# EAGLE board no back side - ssr-board-v10 (EAGLE 7.2.0)
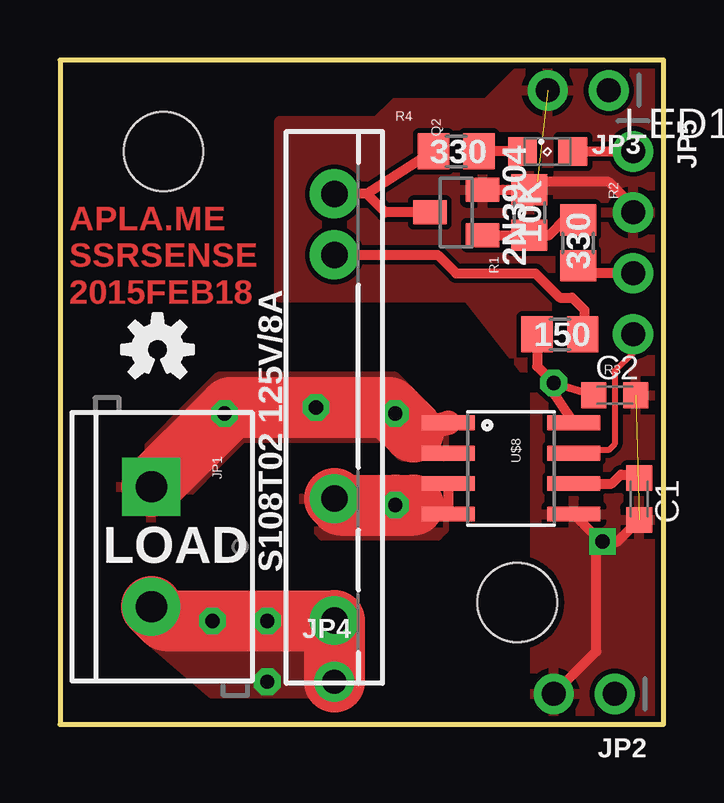
[diagram p0: board, top side]
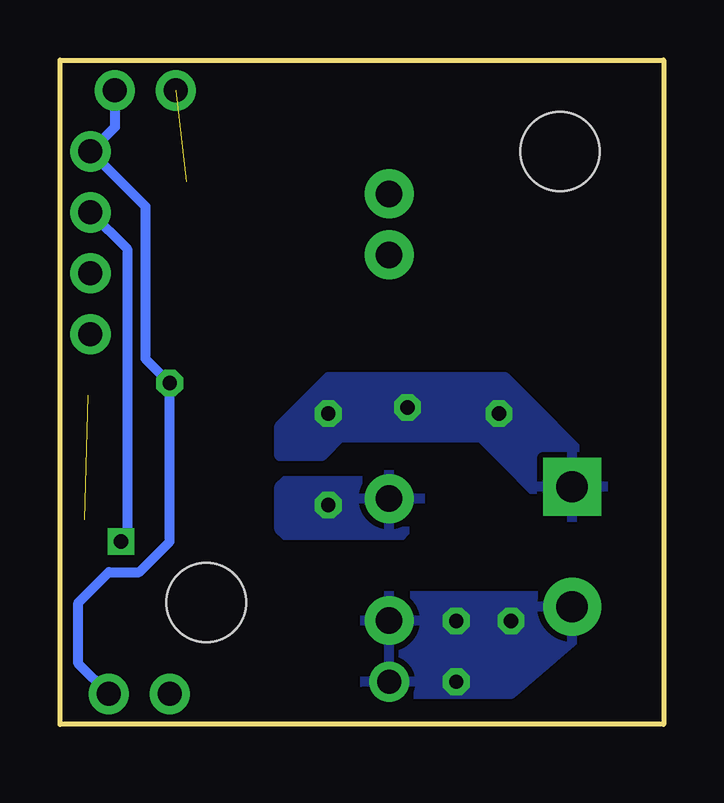
[diagram p1: board, bottom side, seen from below]

Size 25.15 x 27.69 mm. Coordinates in mm from the lower left corner, seen from the top.
Outline: 0,0 25.15,0 25.15,27.69 0,27.69 0,0
Copper layers (1*16): Top 0.035mm / dielectric 1.5mm / Bottom 0.035mm
Design rules "SparkFun *": minimum track width 10mil, minimum drill 20mil, track to track 8mil, track to pad 8mil, pad to pad 8mil, via to via 8mil, smd to smd 8mil, copper to edge 10mil, drill to drill 8mil, minimum pad ring 12mil, minimum via ring 10mil, stop-mask expansion 4mil, vias tented up to drill 20mil, thermal gap 10mil

## Footprints (pad centres in the part's own frame; a part is rotated, then mirrored left to right if it is on the bottom)
C0603K = smd 1.05 x 1.08: 1 -0.875,0; 2 0.875,0
SCREWTERMINAL-5MM-2 = drill 1.3 pad 2.413 square: 1 0,0 | drill 1.3 pad 2.413: 2 5,0
1X02_ROUND = drill 1 pad 1.676: 1 -1.27,0; 2 1.27,0
1X01_ROUND = drill 1 pad 1.676: 1 0,0
1X04_ROUND = drill 1 pad 1.676: 1 -3.81,0; 2 -1.27,0; 3 1.27,0; 4 3.81,0
SML0805 = smd 1.2 x 1.2: A 1.05,0; C -1.05,0
SOT23 = smd 1 x 1.4: 1 -0.95,-1.1; 2 0.95,-1.1; 3 0,1.1
R0805 = smd 1.3 x 1.5: 1 -0.95,0; 2 0.95,0
RELAY-S108T02 = drill 1.1 pad 2.032: 1 -8.88,0; 2 -3.8,0; 3 6.36,0; 4 8.9,0
STAND-OFF = hole 3.302: 0,0
SO08 = smd 0.61 x 2.21: 1 -1.905,-2.616; 2 -0.635,-2.616; 3 0.635,-2.616; 4 1.905,-2.616; 5 1.905,2.616; 6 0.635,2.616; 7 -0.635,2.616; 8 -1.905,2.616

## Placement (x,y rotation side)
C1  [C0603K]  24.13,9.4 270 top
C2  [C0603K]  23.11,13.72 0 top
JP1  Load  [SCREWTERMINAL-5MM-2]  3.81,9.91 270 top
JP2  [1X02_ROUND]  21.84,1.27 180 top
JP3  [1X02_ROUND]  21.59,26.42 180 top
JP4  [1X01_ROUND]  11.43,1.78 0 top
JP5  [1X04_ROUND]  23.88,20.07 270 top
LED1  [SML0805]  20.32,23.88 0 top
Q2  2N3904  [SOT23]  16.51,21.34 90 top
R1  10K  [R0805]  19.56,21.34 90 top
R2  330  [R0805]  21.59,20.07 270 top
R3  150  [R0805]  20.83,16.26 180 top
R4  330  [R0805]  16.51,23.88 0 top
U1  S108T02  [RELAY-S108T02]  11.43,13.21 90 top
U$2  OSHW-LOGO  [OSHW-LOGO-S]  4.06,15.62 0 top
U$4  STAND-OFF  [STAND-OFF]  19.05,5.08 0 top
U$7  STAND-OFF  [STAND-OFF]  4.32,23.88 0 top
U$8  ACS712  [SO08]  18.8,10.67 270 top
U$9  CREATIVE_COMMONS  [CREATIVE_COMMONS]  -27.94,-37.59 0 top  (outside the outline)

## Library data of the parts
C1 C2 = resistor
JP1 U1 U$2 U$4 U$7 U$9 = SparkFun
JP2-JP5 = microbuilder
LED1 = led
Q2 = transistor
R1-R4 = rcl
U$8 = SparkFun-AnalogIC

## Nets
5V: C2.1 JP2.1 JP3.1 JP5.1 LED1.A R3.2 U$8.8
COIL: Q2.3 R4.1 U1.4
CTL: JP5.3 R2.2
CURRENT: JP5.4 U$8.7
FILTER: C1.1 U$8.6
GND: C1.2 C2.2 JP2.2 JP3.2 JP5.2 Q2.2 R1.2 U$8.5
LOAD1: JP1.2 JP4.1 U1.1
LOAD2: U1.2 U$8.3 U$8.4
LOADSENSE: JP1.1 U$8.1 U$8.2
N$1: R3.1 U1.3
N$6: Q2.1 R1.1 R2.1
N$9: LED1.C R4.2

## Tracks (layer width: path | path; a pad name or v marks a point on that pad's centre or on a via)
5V  (via drill 0.6)
  Top 0.305: v20.57,14.22 C2.1
  Top 0.406: U$8.8 20.4,14.05 v20.57,14.22 19.88,14.92 R3.2 | LED1.A JP5.1
  Bottom 0.406: JP2.1 24.38,2.54 24.38,5.08 23.11,6.35 21.84,6.35 20.57,7.62 v20.57,14.22 21.59,15.24 21.59,21.59 JP5.1 22.86,24.89 JP3.1
COIL
  Top 0.406: R4.1 12.78,22.11 | 12.78,22.11 U1.4 | Q2.3 13.55,21.34 12.78,22.11
CTL
  Top 0.406: JP5.3 21.91,18.8 R2.2
CURRENT
  Top 0.254: JP5.4 23.88,15.49 23.11,14.73 23.11,11.68 22.86,11.43 21.54,11.43 U$8.7
FILTER
  Top 0.406: U$8.6 22.99,10.03 23.37,10.41 23.76,10.41 C1.1
GND  (via drill 0.6)  (2 unrouted)
  Top 0.406: Q2.2 R1.2 19.88,22.61 22.86,22.61 23.88,21.59 JP5.2 | JP2.2 22.35,3.05 22.35,7.37 v22.61,7.62 | v22.61,7.62 22.55,7.62 U$8.5 | v22.61,7.62 23.23,7.62 C1.2
  Bottom 0.406: JP5.2 22.35,19.81 22.35,7.87 v22.61,7.62
  pour Top: 9.14,25.15 13.21,25.15 13.97,25.91 17.78,25.91 19.56,27.69 25.15,27.69 25.15,-0.51 19.81,-0.51 19.81,14.22 17.02,17.78 9.14,17.78
LOAD1  (via drill 0.6)
  Top 2.54: JP1.2 4.39,4.33 U1.1 JP4.1
  other vias: 6.35,4.32 8.64,4.32 8.64,1.78
  pour Top: 3.3,5.84 4.32,5.84 4.83,5.33 11.94,5.33 12.45,4.57 12.45,1.52 12.19,1.27 6.35,1.27 2.79,4.32 2.79,5.33
  pour Bottom: 3.3,5.84 4.32,5.84 4.83,5.33 11.94,5.33 12.45,4.57 12.45,1.52 12.19,1.27 6.35,1.27 2.79,4.32 2.79,5.33
LOAD2  (via drill 0.6)
  Top 0.406: U$8.3 U$8.4 14.78,9.14 14.73,9.14 15.24,8.64 14.99,8.64 14.73,8.89 | 14.48,8.89 11.68,8.89 11.43,9.14 11.68,9.14 12.19,8.64 12.19,8.89 11.94,9.14
  Top 2.54: U1.2 11.69,9.14 11.94,9.14 v13.97,9.14 14.73,9.14
  pour Bottom: 10.16,9.4 10.16,8.64 10.92,7.87 15.75,7.87 16,8.13 16,9.91 15.75,10.16 12.19,10.16 11.94,10.41 10.67,10.41 10.41,10.16 10.16,9.91
  pour Top: 10.16,9.4 10.16,8.64 10.92,7.87 15.75,7.87 16,8.13 16,9.91 15.75,10.16 12.19,10.16 11.94,10.41 10.67,10.41 10.41,10.16 10.16,9.91
LOADSENSE  (via drill 0.6)
  Top 0.406: 14.73,12.19 14.73,11.73 U$8.2
  Top 1.016: 14.48,12.19 14.73,12.19 14.78,12.19 U$8.1
  Top 2.54: JP1.1 v6.86,12.95 7.11,13.21 v10.67,13.21 13.72,13.21 v13.97,12.95 14.73,12.19
  pour Bottom: 13.97,14.48 6.6,14.48 2.54,10.41 2.54,9.14 3.05,8.64 4.32,8.64 7.62,11.94 13.46,11.94 14.22,11.18 16,11.18 16,12.45
  pour Top: 13.97,14.48 6.6,14.48 2.54,10.41 2.54,9.14 3.05,8.64 4.32,8.64 7.62,11.94 13.46,11.94 14.22,11.18 16,11.18 16,12.45
N$1
  Top 0.406: U1.3 15.74,19.57 16.51,18.8 19.81,18.8 20.83,17.78 21.34,17.78 21.84,17.27 21.84,16.32 R3.1
N$6
  Top 0.406: Q2.1 R1.1 20.39,20.39 21.08,21.08 21.52,21.08 R2.1
N$9
  Top 0.406: LED1.C R4.2

## Text on the board
Top: APLA.ME / SSRSENSE / 2015FEB18
tPlace: LOAD | S108T02 125V/8A